# Altium PCB starter.PcbDoc
Units mm, origin at the board's own origin, x right, y up, seen from the top; angles counter-clockwise.
Board outline 165 x 28 mm, 2 copper layers (Top Layer, Bottom Layer); 42 components, 44 nets, 194 pads, 4 vias.
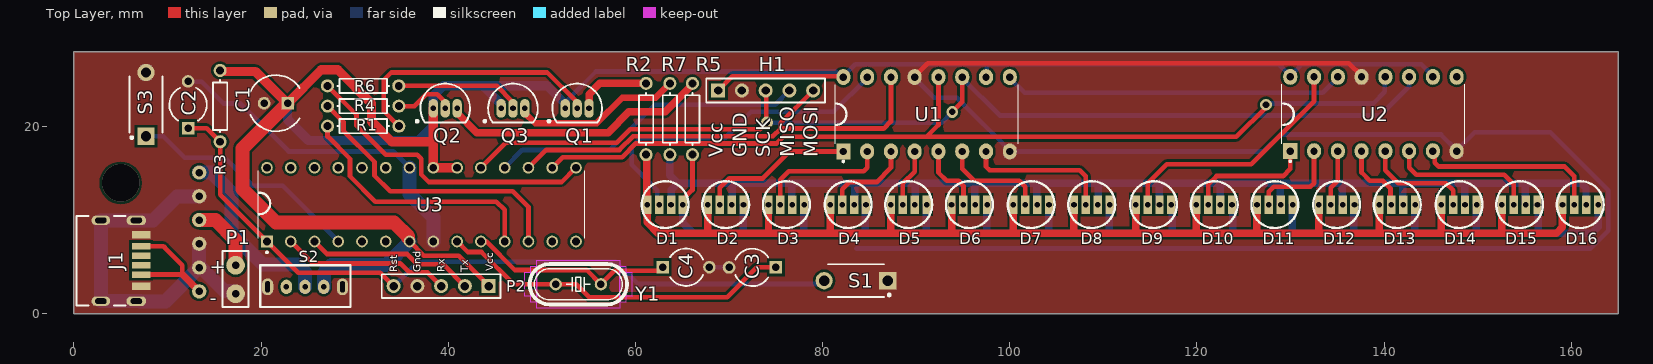
[diagram p0: Top Layer view]
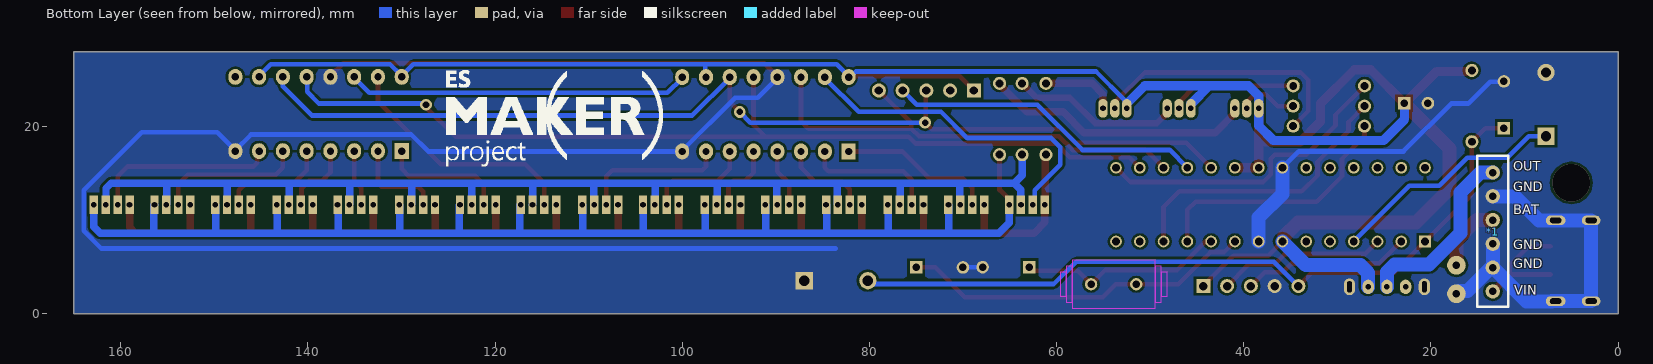
[diagram p1: Bottom Layer view, seen from below]

## Layer stack, top to bottom
Top Solder: solder mask 0.0102, Solder Resist, Dk 3.5
Top Layer: signal copper 0.0356
Dielectric 1: dielectric 0.32, FR-4, Dk 4.8
Bottom Layer: signal copper 0.0356
Bottom Solder: solder mask 0.0102, Solder Resist, Dk 3.5

## Board outline
0,0 165,0 165,28 0,28

## Design rules (kind name [scope] priority, off if disabled: settings)
Clearance [All] p1: gap=0.254 ignorepadtopadclearanceinfootprint=FALSE
PolygonConnect [All] p1: connectstyle=Direct reliefconductorwidth=0.254 reliefentries=4 polygonreliefangle="90 Angle" airgapwidth=0.254
RoutingVias [All] p1: holewidth=0.711 width=1.27 viastyle="Through Hole" minholewidth=0.711 minwidth=1.27 maxholewidth=0.711 maxwidth=1.27
SolderMaskExpansion [All] p1: expansion=0.102
Width [All] p1: maxlimit=5 minlimit=0.254 preferedwidth=0.5
30 further rules are at their usual default settings.

## Components (designator, comment, footprint, x,y, rotation, side; value= is the part's Value field where it differs from the comment)
*1 "DC-DC converter" "DC-DC converter" 13.386,7.493 r0 bottom
C1 "Cap2" "cap 220" 21.59,22.519 r180 top value=220uF
C2 "Cap2" CAPR5-4X5 12.2,22.352 r90 top value=100pF
C3 "22pF" CAPR5-4X5 72.5,4.975 r180 top
C4 "22pF" CAPR5-4X5 65.4,5 r0 top
D1 "LED" "RGB LED" 61.265,11.684 r0 top
D2 "LED" "RGB LED" 67.742,11.684 r0 top
D3 "LED" "RGB LED" 74.219,11.684 r0 top
D4 "LED" "RGB LED" 80.823,11.684 r0 top
D5 "LED" "RGB LED" 87.3,11.684 r0 top
D6 "LED" "RGB LED" 93.777,11.684 r0 top
D7 "LED" "RGB LED" 100.381,11.684 r0 top
D8 "LED" "RGB LED" 106.858,11.684 r0 top
D9 "LED" "RGB LED" 113.462,11.684 r0 top
D10 "LED" "RGB LED" 119.939,11.684 r0 top
D11 "LED" "RGB LED" 126.416,11.684 r0 top
D12 "LED" "RGB LED" 133.02,11.684 r0 top
D13 "LED" "RGB LED" 139.497,11.684 r0 top
D14 "LED" "RGB LED" 146.101,11.684 r0 top
D15 "LED" "RGB LED" 152.578,11.684 r0 top
D16 "LED" "RGB LED" 159.055,11.684 r0 top
H1 "ISP upload" HDR1X5 68.834,23.876 r0 top
J1 "USB4105-GF-A" GCT_USB4105-GF-A 2.875,5.684 r270 top
P1 "PowerIn" PowerIn 17.272,5.207 r270 top
P2 "UART" UART 44.32,2.978 r180 top
Q1 "PNP" TO-226-AE 53.772,21.971 r270 top
Q2 "PNP" TO-226-AE 39.675,21.971 r270 top
Q3 "PNP" TO-226-AE 46.914,21.971 r270 top
R1 "Res1" AXIAL-0.3 30.912,20.066 r180 top value=1K
R2 "Res1" AXIAL-0.3 61.138,20.828 r270 top value=100
R3 "Res1" AXIAL-0.3 15.621,22.211 r90 top value=10K
R4 "Res1" AXIAL-0.3 30.912,22.211 r180 top value=1K
R5 "Res1" AXIAL-0.3 66.091,20.828 r270 top value=100
R6 "Res1" AXIAL-0.3 30.9,24.37 r180 top value=1K
R7 "Res1" AXIAL-0.3 63.678,20.828 r270 top value=100
S1 "SW-PB" SPST-2 83.566,3.556 r180 top
S2 "SW-SPDT" SW-TRI 24.7,2.9 r0 top
S3 "SW-PB" SPST-2 7.7,22.4 r90 top
U1 "SN74HC595N" DIP794W45P254L1969H508Q16 91.11,21.336 r90 top
U2 "SN74HC595N" DIP794W45P254L1969H508Q16 138.862,21.366 r90 top
U3 "ATMEGA328-PU" DIP787W46P254L3467H508Q28 37.135,11.684 r90 top
Y1 "DIP-CRYSTAL-16MHZ-18PF-30PPM-40R(HC49US)" HC49US 53.899,3.175 r180 top

## Footprints (in the part's own frame and the unit in brackets; to place one, negate y for a bottom-side part, rotate by r counter-clockwise, add the part's x,y. Pads: shape width x height; smd on the part's side, far side on the other; paste and mask are expansions set on the pad)
AXIAL-0.3 [mm] "Axial Device, Thru-Hole; 2 Leads; 0.3 in Pin Spacing"
  round 1.4 hole 0.85: 1(-3.81,0) 2(3.81,0)
  silkscreen extent -2.77,-0.76 2.77,0.76
"cap 220" [mm] "Capacitor; 2 Leads"
  rect 1.35x1.35 hole 0.8: 1(-1.27,0)
  round 1.35 hole 0.8: 2(1.27,0)
  silkscreen extent -2.53,-3 2.73,3
CAPR5-4X5 [mm] "Capacitor; 2 Leads"
  rect 1.35x1.35 hole 0.8: 1(-2.5,0)
  round 1.35 hole 0.8: 2(2.5,0)
  silkscreen extent -1.69,-2 1.82,2
"DC-DC converter" [mil]
  round 60 hole 31.5: 1(0,200) 2(0,100) 3(0,0) 4(0,-100) 5(0,-200) 6(0,-300)
  Top Layer pour cut-out: -65,265
  silkscreen extent -65,-370 65,265
DIP787W46P254L3467H508Q28 [mm]
  rect 1.25x1.25 hole 0.83: 1(-3.937,16.51)
  round 1.25 hole 0.83: 2(-3.937,13.97) 3(-3.937,11.43) 4(-3.937,8.89) 5(-3.937,6.35) 6(-3.937,3.81) 7(-3.937,1.27) 8(-3.937,-1.27) 9(-3.937,-3.81) 10(-3.937,-6.35) 11(-3.937,-8.89) 12(-3.937,-11.43) 13(-3.937,-13.97) 14(-3.937,-16.51) 15(3.937,-16.51) 16(3.937,-13.97) 17(3.937,-11.43) 18(3.937,-8.89) 19(3.937,-6.35) 20(3.937,-3.81) 21(3.937,-1.27) 22(3.937,1.27) 23(3.937,3.81) 24(3.937,6.35) 25(3.937,8.89) 26(3.937,11.43) 27(3.937,13.97) 28(3.937,16.51)
  silkscreen extent -5.2,-17.45 3.62,17.45, body extent -5.08,-17.34 5.08,17.34, height 4.57
DIP794W45P254L1969H508Q16 [mm]
  rect 1.7x1.5 hole 0.78: 1(-3.97,8.89)
  oval 1.7x1.5 hole 0.78: 2(-3.97,6.35) 3(-3.97,3.81) 4(-3.97,1.27) 5(-3.97,-1.27) 6(-3.97,-3.81) 7(-3.97,-6.35) 8(-3.97,-8.89) 9(3.97,-8.89) 10(3.97,-6.35) 11(3.97,-3.81) 12(3.97,-1.27) 13(3.97,1.27) 14(3.97,3.81) 15(3.97,6.35) 16(3.97,8.89)
  silkscreen extent -5.13,-9.77 3.18,9.77
GCT_USB4105-GF-A [mm]
  rect 0.7x2 smd: A5(-0.544,4.318) A9(1.476,4.318) B5(0.456,4.318) B9(-1.564,4.318)
  rect 0.8x2 smd: A12(2.706,4.318) B12(-2.794,4.318)
  oval 1.05x2.1 hole 0.6 slot 1.2 at 90 deg: S1(-4.32,3.8) S4(4.32,3.8)
  oval 1x2 hole 0.6 slot 1.2 at 90 deg: S2(-4.32,0) S3(4.32,0)
  silkscreen extent -4.79,-2.6 4.79,2.65, body extent -4.79,-2.71 4.79,5, height 3.31
HC49US [mil]
  round 52 hole 32: 1(-95,0) 2(95,0)
  Keep-Out Layer region: -175,-75 -200,-75 -200,75 -175,75
  Keep-Out Layer region: -200,-50 -225,-50 -225,50 -200,50
  Keep-Out Layer region: 225,-50 200,-50 200,50 225,50
  Keep-Out Layer region: 175,-100 -175,-100 -175,100 175,100
  Keep-Out Layer region: 200,-75 175,-75 175,75 200,75
  silkscreen extent -205,-85 205,85
HDR1X5 [mm] "Connector; Header; 5 Position"
  rect 1.5x1.5 hole 0.9: 1(0,0)
  round 1.5 hole 0.9: 2(2.54,0) 3(5.08,0) 4(7.62,0) 5(10.16,0)
  silkscreen extent -1.27,-1.27 11.43,1.27
PowerIn [mm] "Connector; Header; 2 Position"
  round 2 hole 0.8: 1(0,0) 2(3.048,0)
  silkscreen extent -1.52,-1.4 4.44,1.4
"RGB LED" [mm] "5mm"
  rect 0.9x2 hole 0.6: 1(0,0) 2(1.27,0) 3(2.54,0) 4(3.81,0)
  silkscreen extent -0.59,-2.5 4.41,2.5
SPST-2 [mm] "Switch; 2 Leads"
  rect 1.85x1.85 hole 1.1: 1(-3.4,0)
  round 1.85 hole 1.1: 2(3.4,0)
  silkscreen extent -3.68,-1.75 3,1.75
SW-TRI [mm]
  oval 1.2x1.524 hole 0.6: 1(-2,0) 2(0,0) 3(2,0)
  oval 1.2x1.8 hole 1.2 slot 0.5 at 0 deg: 5(-4,0) 5(4,0)
  silkscreen extent -4.79,-2.16 4.86,2.29
TO-226-AE [mm] "TO, Flat Index; 3 In-Line, Axial Leads; Body Dia. 4.8mm; Leads 0.55 x 0.51 mm (max)"
  oval 2x1 hole 0.6: 1(0,-1.27) 2(0,0) 3(0,1.27)
  silkscreen extent -2.65,-3.13 1.52,2.65, body extent -2.65,-2.66 1.52,2.66, height 7.87
UART [mm] "Connector; Header; 5 Position, UART, for uploading"
  rect 1.5x1.5 hole 0.9: 1(0,0)
  round 1.5 hole 0.9: 2(2.54,0) 3(5.08,0) 4(7.62,0) 5(10.16,0)
  silkscreen extent -1.27,-1.27 11.43,1.27

## Part data
C1: library part Cap220, "Capacitor", PackageDescription="Capacitor; 2 Leads", PackageReference=CAPR5-4X5, Published=23-Sep-2002, Publisher="Altium Limited"
C2: "Capacitor", PackageDescription="Capacitor; 2 Leads", PackageReference=CAPR5-4X5, Published=23-Sep-2002, Publisher="Altium Limited"
C3 C4: "SMD Capacitor X6S(EIA) with Capacitance: 22pF", Package="1206 Murata", Availability=Warning, Check_prices=https://www.snapeda.com/parts/GRM319C81C106MA12J/Murata/view-part/1894707/?ref=eda, MF=Murata, MP=GRM319C81C106MA12J, Price=None, Purchase-URL=https://pricing.snapeda.com/search/part/GRM319C81C106MA12J/?ref=eda, SnapEDA_Link=https://www.snapeda.com/parts/GRM319C81C106MA12J/Murata/view-part/1894707/?ref=snap
D1 D2 D3 D4 D5 D6 D7 D8 D9 D10 D11 D12 D13 D14 D15 D16: library part "RGB LED"
J1: "USB-C (USB TYPE-C) USB 2.0 Receptacle Connector 24 (16+8 Dummy) Position Surface Mount, Right Angle; Through Hole", Package=None, Availability=Warning, Check_prices=https://www.snapeda.com/parts/USB4105-GF-A/Global%20Connector%20Technology/view-part/4423780/?ref=eda, MF=GCT, MP=USB4105-GF-A, Price=None, Purchase-URL=https://pricing.snapeda.com/search/part/USB4105-GF-A/?ref=eda, SnapEDA_Link=https://www.snapeda.com/parts/USB4105-GF-A/Global%20Connector%20Technology/view-part/4423780/?ref=snap
P1: "Header, 2-Pin", LatestRevisionDate=17-Jul-2002, LatestRevisionNote="Re-released for DXP Platform.", Publisher="Altium Limited"
P2: "Header, 5-Pin, UART, for uploading", LatestRevisionDate=17-Jul-2002, LatestRevisionNote="Re-released for DXP Platform.", Publisher="Altium Limited"
Q1 Q2 Q3: library part C9013, "PNP Bipolar Transistor", LatestRevisionDate=29-May-2009, LatestRevisionNote="IPC-7351 Footprint Added.", PackageDescription="3-Pin SOT-23 Package 0.95 mm Pitch, 2.4 mm Lead Span", PackageReference=SOT-23B, PackageVersion=Aug-1999, Published=8-Jun-2000, Publisher="Altium Limited"
R1 R2 R3 R4 R5 R6 R7: "Resistor", LatestRevisionDate=17-Jul-2002, LatestRevisionNote="Re-released for DXP Platform.", PackageDescription="Axial Device, Thru-Hole; 2 Leads; 0.3 in Pin Spacing", PackageReference=AXIAL-0.3, Published=8-Jun-2000, Publisher="Altium Limited"
S1 S3: "Switch", LatestRevisionDate=17-Jul-2002, LatestRevisionNote="Re-released for DXP Platform.", PackageDescription="Switch; 2 Leads", PackageReference=SPST-2, Published=24-Mar-1999, Publisher="Altium Limited"
S2: "SPDT Subminiature Toggle Switch, Right Angle Mounting, Vertical Actuation", ComponentLink1Description="Manufacturer Link", ComponentLink1URL=http://www.apem.com, DatasheetVersion=05-Dec-2000, LatestRevisionDate=17-Dec-2003, LatestRevisionNote="Schematic revised, PCB Footprint replaced.", PackageDescription="Switch; 4 Leads", PackageReference=TL36WW15050, Published=24-Mar-1999, Publisher="Altium Limited"
U1 U2: "8-bit shift registers with 3-state output registers 16-PDIP -40 to 85", Package="PDIP-16 Texas Instruments", Availability=Unavailable, MF="Texas Instruments", MP=SN74HC595N, Price=None, SnapEDA_Link=https://www.snapeda.com/parts/SN74HC595N/Texas%20Instruments/view-part/2479486/?ref=snap, Texas_Instruments-Purchase-URL=https://snapeda.com/shop?store=Texas+Instruments&id=2479486
U3: "AVR AVRAR ATmega Microcontroller IC 8-Bit 20MHz 32KB (16K x 16) FLASH 28-PDIP", Package="DIP-28 Microchip Technology", Availability=Good, Check_prices=https://www.snapeda.com/parts/ATMEGA328-PU/Microchip/view-part/4833845/?ref=eda, MF="Microchip Technology", MP=ATMEGA328-PU, Price=None, Purchase-URL=https://pricing.snapeda.com/search/part/ATMEGA328-PU/?ref=eda, SnapEDA_Link=https://www.snapeda.com/parts/ATMEGA328-PU/Microchip/view-part/4833845/?ref=snap
Y1: "306010014", Package=None, Availability=Unavailable, MF=Kyocera, MP=HC49US16000MHZ, Price=None, SnapEDA_Link=https://www.snapeda.com/parts/HC49US16000MHZ/Kyocera/view-part/105665/?ref=snap

## Via types
v1: diameter 1.27, hole 0.711, Top Layer to Bottom Layer, tented both sides, 3 vias
v2: diameter 4, hole 4, Top Layer to Bottom Layer, tented both sides, 1 vias

## Nets (pads, with @x,y where several pads share a name; then routed paths per layer and width w, separated by ;. In a path a pad name is that pad's centre, name@x,y a point inside that pad or via, vN(x,y) a via of type N, cw(c..) or ccw(c..) an arc to the next point about the centre after c; other vN are vias at no path point)
GND: *1.2 *1.3 *1.5 C1.2 C2.2 C3.2 C4.2 H1.2 J1.A12 J1.B12 J1.S1 J1.S2 J1.S3 J1.S4 P1.2 P2.4 S1.1 S2.5 S3.2 U1.8 U1.13 U2.8 U2.13 U3.8 U3.22 | length 295.5
  Top Layer w0.5: U1.13 89.84,25.406 91.234,26.8 136.227,26.8 137.592,25.436 U2.13
  Bottom Layer w0.5: C2.2 12.235,24.817 13.67,24.817 16.008,22.479 17.82,22.479 22.933,17.366 34.12,17.366 U3.22 ; P1.2@16.985,2.446 P1.2 ; C4.2 67.912,4.988 69.988,4.988 C3.2 ; 83.585,6.985 162.052,6.985 163.957,8.89 163.957,13.208 157.734,19.431 149.687,19.431 U2.8@147.752,17.496 ; U1.13 89.84,25.206 91.932,23.114 94.352,23.114 100,17.466 U1.8 127.145,17.366 128.956,19.177 146.07,19.177 U2.8@147.752,17.496 ; U2.13@137.592,25.236 U2.13 ; U2.8 U2.8@147.752,17.496
  Bottom Layer w1.5: *1.3 *1.2 ; *1.5 11.011,12.573 11.011,12.566 8.449,10.004 J1.S1 J1.S2 J1.S3 J1.S4 7.055,1.364 7.089,1.33 8.128,1.33 8.444,1.33 9.763,1.33 *1.2 ; P1.2@16.985,2.446 16.108,2.446 13.601,4.953 *1.2 ; U3.22 35.865,12.827 38.405,10.287 U3.8
MISO: H1.4 U3.18 | length 33.8
  Bottom Layer w0.5: U3.18 47.93,17.526 57.227,17.526 62.045,22.344 74.922,22.344 H1.4
MOSI: H1.5 U1.14 U3.17 | length 51
  Top Layer w0.5: U3.17 50.47,17.526 58.293,17.526 59.743,18.976 74.691,18.976 75.527,19.812 ; H1.5 75.527,20.409 75.527,19.812 ; U1.14 87.3,20.574 86.538,19.812 75.527,19.812
Net*1_1: *1.1 J1.A9 J1.B9 | length 13.3
  Top Layer w0.5: J1.A9 11.591,4.208 11.591,5.212 9.655,7.148 ; J1.B9 9.555,7.248 9.655,7.148 ; 9.691,7.148 9.655,7.148
  Top Layer w0.762: 11.591,4.208 *1.1
  Top Layer w1.016: *1.1 *1.1@13.386,2.489
Net*1_4: *1.4 P1.1 | length 7.4
  Top Layer w1.5: *1.4 15.113,10.033 17.272,7.874 P1.1
Net*1_6: *1.6 S2.2 | length 19.8
  Bottom Layer w1.5: *1.6 14.687,15.113 16.841,12.959 16.841,8.659 20.2,5.3 23.9,5.3 24.7,4.5 S2.2
NetC2_1: C2.1 P2.5 R3.1 S1.2 U3.1 | length 80.5
  Top Layer w0.5: C2.1 14.17,19.852 R3.1 15.621,12.751 U3.1 23.972,4.4 32.738,4.4 P2.5
  Bottom Layer w0.5: P2.5 36.77,5.588 57.912,5.588 60.3,3.2 79.86,3.2 S1.2@80.16,3.5
NetC3_1: C3.1 U3.9 Y1.2 | length 37.8
  Top Layer w0.5: U3.9 42.074,6.618 43.547,6.618 46.99,3.175 Y1.2 53.669,3.175 55.044,1.8 69.8,1.8 72.975,4.975 C3.1
NetC4_1: C4.1 U3.10 Y1.1 | length 22.1
  Top Layer w0.5: U3.10 44.069,7.747 47.117,4.699 54.788,4.699 Y1.1 57.737,4.6 62.5,4.6 C4.1
NetD1_1: D1.1 D2.1 D3.1 D4.1 D5.1 D6.1 D7.1 D8.1 D9.1 D10.1 D11.1 D12.1 D13.1 D14.1 D15.1 D16.1 R2.2 | length 150.8
  Top Layer w0.8: R2.2 61.201,16.954 61.201,11.747 D1.1 61.265,9.779 62.408,8.636 67.742,8.636 ; D2.1 67.742,8.636 ; D3.1 74.219,8.636 ; D4.1 80.823,8.636 ; D5.1 87.3,8.636 ; D6.1 93.777,8.636 ; D7.1 100.381,8.636 ; D8.1 106.858,8.636 ; D9.1 113.462,8.636 ; D10.1 119.939,8.636 ; D11.1 126.416,8.636 ; 132.893,8.636 126.416,8.636 ; D12.1 133.02,8.636 139.497,8.636 ; D13.1 139.497,8.636 ; D14.1 146.101,8.636 ; D15.1 152.578,8.636 ; D16.1 159.055,9.271 158.42,8.636 152.578,8.636 ; 67.742,8.636 74.219,8.636 ; 74.219,8.636 80.823,8.636 ; 80.823,8.636 87.3,8.636 ; 87.3,8.636 93.777,8.636 ; 93.777,8.636 100.381,8.636 ; 100.381,8.636 106.858,8.636 ; 106.858,8.636 113.462,8.636 ; 113.462,8.636 119.939,8.636 ; 119.939,8.636 126.416,8.636 ; 139.497,8.636 146.101,8.636 ; 146.101,8.636 152.578,8.636
NetD1_2: D1.4 D2.4 D3.4 D4.4 D5.4 D6.4 D7.4 D8.4 D9.4 D10.4 D11.4 D12.4 D13.4 D14.4 D15.4 D16.4 R5.2 | length 151.6
  Top Layer w0.5: D1.4 65.075,12.234 66.091,13.25 R5.2
  Bottom Layer w0.8: D1.4 65.075,9.728 66.167,8.636 71.501,8.636 ; D2.4 71.501,11.633 71.501,8.636 ; D3.4 77.978,11.633 77.978,8.636 ; D4.4 84.582,11.633 84.582,8.636 ; D5.4 91.059,11.633 91.059,8.636 ; D6.4 97.536,11.633 97.536,8.636 ; D7.4 104.14,11.633 104.14,8.636 ; D8.4 110.617,11.633 110.617,8.636 ; D9.4 117.348,11.608 117.348,8.636 ; D10.4 123.825,11.608 123.825,8.636 ; D11.4 130.175,11.633 130.175,8.636 ; D12.4 136.779,11.633 136.779,8.636 ; D13.4 143.256,11.633 143.256,8.636 ; D14.4 149.86,11.633 149.86,8.636 ; D15.4 156.464,11.608 156.464,8.636 ; D16.4 162.865,9.322 162.179,8.636 156.464,8.636 ; 71.501,8.636 77.978,8.636 ; 77.978,8.636 84.582,8.636 ; 84.582,8.636 91.059,8.636 ; 91.059,8.636 97.536,8.636 ; 97.536,8.636 104.14,8.636 ; 104.14,8.636 110.617,8.636 ; 110.617,8.636 117.348,8.636 ; 117.348,8.636 123.825,8.636 ; 123.825,8.636 130.175,8.636 ; 130.175,8.636 136.779,8.636 ; 136.779,8.636 143.256,8.636 ; 143.256,8.636 149.86,8.636 ; 149.86,8.636 156.464,8.636
NetD1_3: D1.3 D2.3 D3.3 D4.3 D5.3 D6.3 D7.3 D8.3 D9.3 D10.3 D11.3 D12.3 D13.3 D14.3 D15.3 D16.3 R7.2 | length 137.3
  Bottom Layer w0.8: R7.2 63.678,14.808 64.516,13.97 ; D1.3 63.805,13.259 64.516,13.97 ; D2.3 70.358,11.76 70.358,13.97 ; D3.3 76.708,11.735 76.708,13.97 ; D4.3 83.439,11.76 83.439,13.97 ; D5.3 89.916,11.76 89.916,13.97 ; D6.3 96.266,11.735 96.266,13.97 ; D7.3 102.87,11.735 102.87,13.97 ; D8.3 109.474,11.76 109.474,13.97 ; D9.3 115.951,11.735 115.951,13.97 ; D10.3 122.479,13.97 115.951,13.97 ; 122.555,13.97 128.905,13.97 ; D11.3 128.905,11.735 128.905,13.97 ; D12.3 135.509,11.735 135.509,13.97 ; D13.3 141.986,11.735 141.986,13.97 ; D14.3 148.59,11.735 148.59,13.97 ; D15.3 155.067,11.735 155.067,13.97 ; D16.3 161.572,11.707 161.572,13.434 161.036,13.97 155.067,13.97 ; 64.516,13.97 70.358,13.97 ; 70.358,13.97 76.708,13.97 ; 76.708,13.97 83.439,13.97 ; 83.439,13.97 89.916,13.97 ; 89.916,13.97 96.266,13.97 ; 96.266,13.97 102.87,13.97 ; 102.87,13.97 109.474,13.97 ; 109.474,13.97 115.951,13.97 ; 128.905,13.97 135.509,13.97 ; 135.509,13.97 141.986,13.97 ; 141.986,13.97 148.59,13.97 ; 148.59,13.97 155.067,13.97
NetD1_4: D1.2 U1.15 | length 35.7
  Bottom Layer w0.5: D1.2 62.335,11.884 62.335,13.217 59.614,15.938 59.614,17.831 60.579,18.796 69.556,18.796 72.35,21.59 81.144,21.59 84.76,25.206 U1.15
NetD2_4: D2.2 U1.1 | length 16.6
  Top Layer w0.5: D2.2 69.012,13.462 70.028,14.478 73.584,14.478 76.472,17.366 U1.1
NetD3_4: D3.2 U1.2 | length 14.2
  Top Layer w0.5: D3.2 75.489,14.351 76.378,15.24 84.377,15.24 84.76,15.623 U1.2
NetD4_4: D4.2 U1.3 | length 9.5
  Top Layer w0.5: D4.2 82.093,13.335 82.855,14.097 85.776,14.097 87.3,15.621 U1.3
NetD5_4: D5.2 U1.4 | length 6.2
  Top Layer w0.5: D5.2 88.57,13.946 89.84,15.216 U1.4
NetD6_4: D6.2 U1.5 | length 7.5
  Top Layer w0.5: U1.5 92.38,15.113 93.269,14.224 94.539,14.224 95.047,13.716 D6.2
NetD7_4: D7.2 U1.6 | length 11.3
  Top Layer w0.5: U1.6 94.92,15.494 96.19,14.224 101.016,14.224 101.651,13.589 D7.2
NetD8_4: D8.2 U1.7 | length 15.8
  Top Layer w0.5: U1.7 97.46,15.748 97.841,15.367 107.493,15.367 108.128,14.732 D8.2
NetD9_4: D9.2 U2.15 | length 26.3
  Top Layer w0.5: D9.2 114.732,13.97 116.764,16.002 125.781,16.002 132.512,22.733 U2.15
NetD10_4: D10.2 U2.1 | length 13.5
  Top Layer w0.5: D10.2 121.209,13.843 122.098,14.732 129.21,14.732 129.972,15.494 U2.1
NetD11_4: D11.2 U2.2 | length 10
  Top Layer w0.5: D11.2 127.686,13.081 128.194,13.589 132.131,13.589 132.512,13.97 U2.2
NetD12_4: D12.2 U2.3 | length 6
  Top Layer w0.5: D12.2 134.29,13.462 135.052,14.224 U2.3
NetD13_4: D13.2 U2.4 | length 7.8
  Top Layer w0.5: U2.4 137.592,15.113 138.481,14.224 139.878,14.224 140.679,13.423 140.679,11.772 D13.2
NetD14_4: D14.2 U2.5 | length 11.7
  Top Layer w0.5: U2.5 140.132,15.367 141.529,13.97 146.609,13.97 147.371,13.208 D14.2
NetD15_4: D15.2 U2.6 | length 15.8
  Top Layer w0.5: U2.6 142.672,15.621 143.434,14.859 152.832,14.859 153.848,13.843 D15.2
NetD16_4: D16.2 U2.7 | length 19.9
  Top Layer w0.5: U2.7 145.403,17.204 145.403,16.168 145.823,15.748 159.309,15.748 160.325,14.732 D16.2
NetP2_2: P2.2 U3.3 | length 18.1
  Top Layer w0.5: U3.3 27.052,6.4 35.6,6.4 36.7,5.3 39.458,5.3 P2.2
NetP2_3: P2.3 U3.2 | length 18.1
  Top Layer w0.5: U3.2 25.512,5.4 34.86,5.4 35.815,4.445 37.773,4.445 P2.3
NetQ1_1: Q1.3 R2.1 | length 8.1
  Top Layer w0.8: Q1.3 55.042,23.495 56.185,24.638 R2.1
NetQ1_2: Q1.2 R1.1 | length 28.6
  Top Layer w0.5: R1.1 33.1,21.688 33.1,25 33.9,25.8 50.593,25.8 53.506,22.887 53.506,22.872 53.772,22.606 Q1.2
NetQ2_1: Q2.3 R5.1 | length 29
  Top Layer w0.8: Q2.3 40.945,21.471 43.053,19.363 57.082,19.363 59.309,21.59 63.17,21.59 66.218,24.638 R5.1
NetQ2_2: Q2.2 R4.1 | length 6.5
  Top Layer w0.5: R4.1 36.388,22.211 37.652,23.475 38.821,23.475 39.675,22.621 Q2.2
NetQ3_1: Q3.3 R7.1 | length 18.2
  Top Layer w0.7: Q3.3 48.184,21.471 49.288,20.367 52.959,20.367 52.962,20.37 53.312,20.37 53.315,20.367 54.229,20.367 54.232,20.37 54.582,20.37 54.585,20.367 55.851,20.367 58.598,23.114 62.154,23.114 R7.1
NetQ3_2: Q3.2 R6.1 | length 13.6
  Top Layer w0.5: R6.1 45.165,24.37 46.914,22.621 Q3.2
NetR1_2: R1.2 U3.11 | length 27.7
  Top Layer w0.5: R1.2 27.102,18.967 29.5,16.569 29.5,14.7 32.2,12 45.144,12 46.025,11.119 U3.11
NetR4_2: R4.2 U3.12 | length 31
  Top Layer w0.5: R4.2 28.8,20.513 28.8,19.596 32.12,16.276 32.12,14.78 33.8,13.1 46.9,13.1 48.565,11.435 U3.12
NetR6_2: R6.2 U3.15 | length 33.1
  Top Layer w0.5: R6.2 30.2,21.26 30.2,20.12 33.32,17 36.7,17 37.1,16.6 37.1,14.9 37.9,14.1 52.124,14.1 U3.15
NetS3_1: S3.1 U3.4 | length 25.2
  Bottom Layer w0.5: S3.1 9.56,19 11.86,16.7 16.1,16.7 19.1,13.7 22.292,13.7 U3.4
NetU1_9: U1.9 U2.14 | length 36.6
  Bottom Layer w0.5: U1.9 100,25.206 101.584,23.622 133.438,23.622 135.001,25.185 135.001,25.285 U2.14
NetU1_12: U1.12 U2.12 U3.16 | length 101.1
  Top Layer w0.5: U3.16 52.234,16.75 58.584,16.75 60.056,18.222 75.108,18.222 75.809,18.923 124.206,18.923 127.381,22.098 v1(127.381,22.352) ; 91.148,18.961 92.38,20.193 U1.12 ; U2.12@140.132,25.236 U2.12
  Bottom Layer w0.5: v1(127.381,22.352) 127.508,22.479 138.811,22.479 140.068,23.736 140.068,25.272 U2.12
SCK: H1.3 U1.11 U2.11 U3.19 | length 112.3
  Top Layer w0.5: U3.19 46.144,18.28 57.981,18.28 59.431,19.73 73.324,19.73 v1(74.041,20.447) 73.977,20.511 73.977,23.812 H1.3 ; v1(93.853,21.59) 94.92,22.657 U1.11
  Bottom Layer w0.5: v1(74.041,20.447) 92.71,20.447 v1(93.853,21.59) ; U1.11 94.92,25.206 98.917,21.209 139.573,21.209 142.672,24.308 U2.11
VCC: C1.1 H1.1 P2.1 Q1.1 Q2.1 Q3.1 R3.2 S2.3 U1.10 U1.16 U2.10 U2.16 U3.7 U3.20 U3.21 | length 246.2
  Top Layer w0.5: U3.7@35.426,7.891 35.721,7.891 U3.7 37.384,6.228 41.131,6.228 43.8,3.559 P2.1@43.8,2.9 ; H1.1 70.364,25.406 82.12,25.406 U1.16
  Top Layer w1: R3.2@15.621,25.908 19.391,25.908 22.82,22.479 26.441,26.1 28.2,26.1 31.8,22.5 31.8,20.567 33.967,18.4 38.405,18.4 ; Q2.1 38.405,18.4 ; U3.20 U3.21 38.405,18.4
  Top Layer w1.5: C1.1@22.82,22.479 18.034,17.693 18.034,13.335 21.59,9.779 34.214,9.779 35.721,8.272 U3.7@35.721,8.185
  Bottom Layer w0.5: Q3.1 Q3.1@45.644,22.428 ; Q1.1 52.502,22.471 52.502,22.606 52.768,22.872 52.768,22.887 55.789,25.908 81.447,25.908 82.049,25.306 U1.16 82.22,25.406 83.484,26.67 97.536,26.67 ; U1.10 97.536,25.382 97.536,26.67 ; U2.16 U2.16@129.972,25.436 ; U2.10 145.212,25.436 143.958,26.69 131.226,26.69 U2.16@129.972,25.436 ; 97.536,26.67 128.737,26.67 U2.16@129.972,25.436
  Bottom Layer w1: C1.1@22.82,22.479 22.82,20.792 25.07,18.542 36.83,18.542 38.405,20.117 Q2.1 38.405,23.292 39.497,24.384 43.688,24.384 ; Q3.1@45.644,22.428 43.688,24.384 ; Q1.1@52.502,22.471 50.589,24.384 43.688,24.384
  Bottom Layer w1.5: S2.3 26.7,4.4 27.507,5.207 33.325,5.207 U3.7
pads on no net: J1.A5 J1.B5 S2.1 U2.9 U3.5 U3.6 U3.13 U3.14 U3.23 U3.24 U3.25 U3.26 U3.27 U3.28
copper on no net:
  other v2: 5,14

## Polygon pours and split planes (outlines as drawn)
GND on Top Layer "Top Layer-GND" (solid, pour order 8): 0,0 165,0 165,28 0,28
GND on Top Layer "Top Layer-GND 1" (solid, pour order 6): 0,0
GND on Bottom Layer "Bottom Layer-GND" (solid, pour order 10): 0,0 165,0 165,28 0,28

## Other copper
Top Layer:
  region: 111.3,4.6
  region: 111.3,4.6
  region: 106.3,0
  region: 106.3,0

## Silkscreen, mask and mechanical layers (free items; w line width, h text height)
Top Overlay:
  lines w0.254: 19.812,10.661 ccw(c19.812,11.811) 19.812,12.961 ; 81.407,20.186 ccw(c81.407,21.336) 81.407,22.486 ; 129.21,20.186 ccw(c129.21,21.336) 129.21,22.486
  text "Vcc" at 69.342,16.764 h1.52 r90
  text "GND" at 71.882,16.764 h1.52 r90
  text "SCK" at 74.422,16.764 h1.52 r90
  text "MISO" at 76.962,16.764 h1.52 r90
  text "MOSI" at 79.502,16.764 h1.52 r90
  text "Vcc" at 44.828,4.563 h0.8 r90
  text "Rst" at 34.541,4.436 h0.8 r90
  text "Gnd" at 37.081,4.436 h0.8 r90
  text "Rx" at 39.621,4.436 h0.8 r90
  text "Tx" at 42.161,4.436 h0.8 r90
  text "+" at 14.537,4.3 h1.52
  text "-" at 14.537,1 h1.52
Bottom Overlay:
  drawing of 16 lines, arcs and shapes, not listed

## Text inside footprints (layer, text, board x,y; h text height)
*1: Bottom Overlay "GND" at 11.188,6.932 h1; Bottom Overlay "GND" at 11.188,4.899 h1; Bottom Overlay "BAT" at 11.188,10.657 h1; Bottom Overlay "OUT" at 11.188,15.289 h1; Bottom Overlay "VIN" at 11.104,2.033 h1; Bottom Overlay "GND" at 11.188,13.111 h1